# Allegro board LinkingInterfaceV2_13.brd
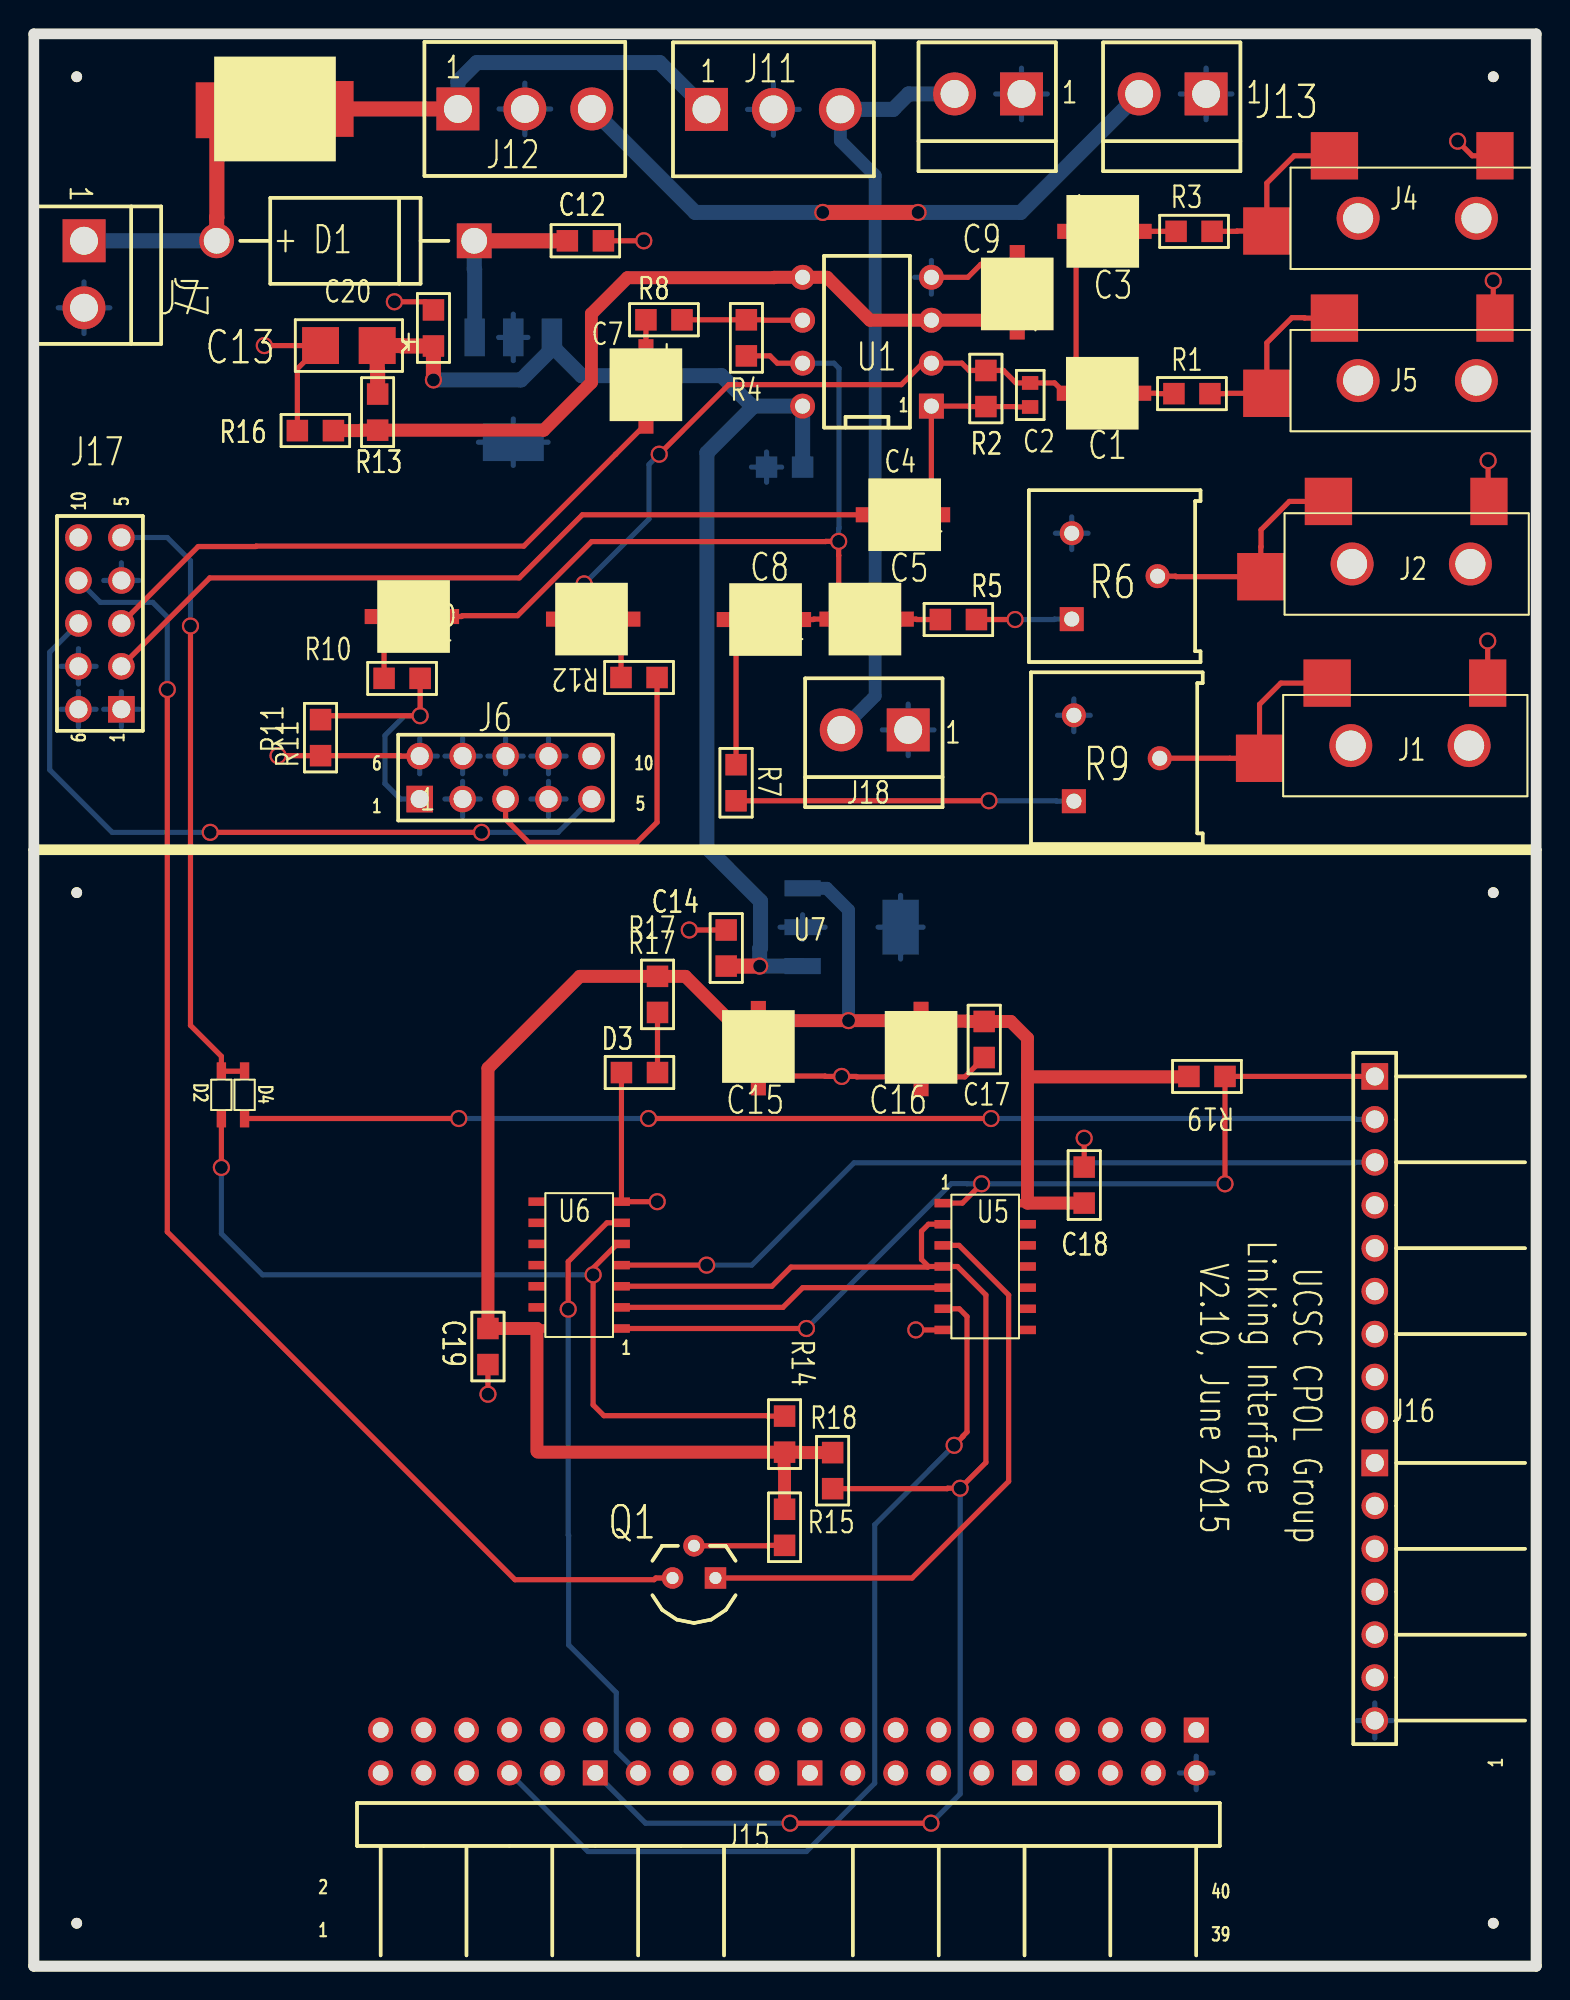
[diagram p0: board, top side]
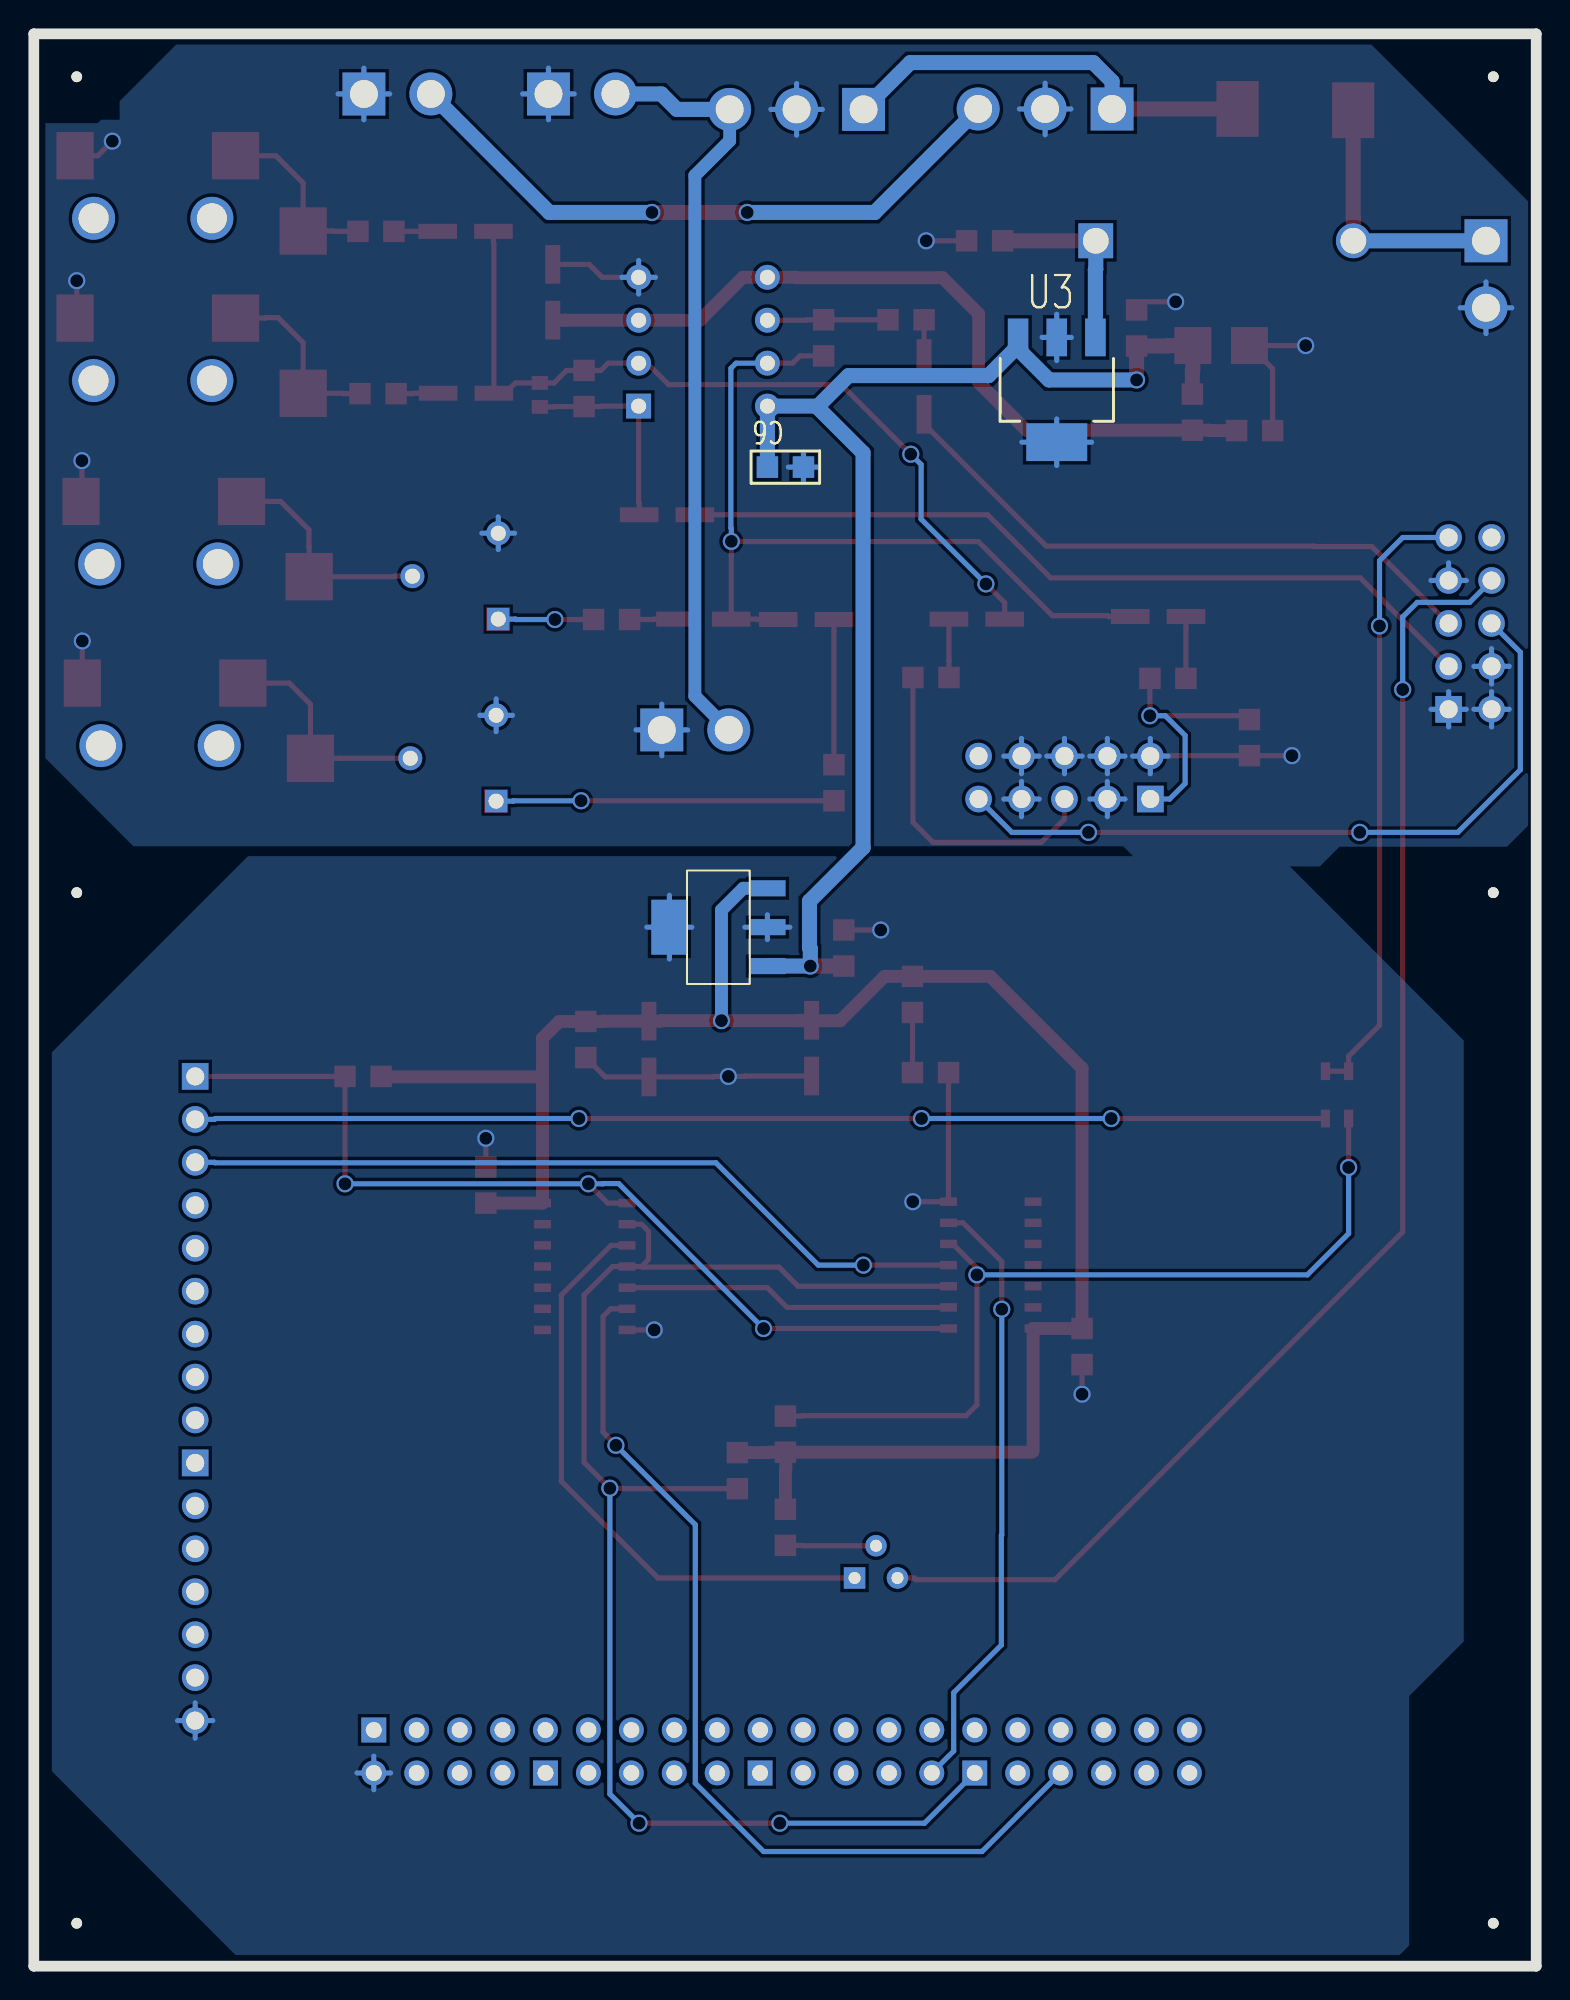
[diagram p1: board, bottom side, seen from below]

Outline 88.9 x 114.3 mm; copper layers: TOP, BOTTOM. Coordinates in mm from the lower left corner of the outline.
Outline path: rectangle 0,0 88.9,114.3 ; 0,114.3 0,0 88.9,0 88.9,114.3 0,114.3

## Placement (name value [footprint] x y rotation side)
C1  10uF  [1_UF_CAP]  61.98 93.04 270 top
C2  100pF  [SMC0603]  58.95 92.23 90 top
C3  10uF  [1_UF_CAP]  62 102.62 270 top
C4  10uF  [1_UF_CAP]  52.78 85.85 90 top
C5  10uF  [1_UF_CAP]  47.93 79.68 270 top
C6  100nF  [SMC0805]  43.36 88.67 0 bottom
C7  1uF  [1_UF_CAP]  36.22 94.79 180 top
C8  10uF  [1_UF_CAP]  44.55 79.65 90 top
C9  4.7uF  [1_UF_CAP]  58.19 97.66 0 top
C10  10uF  [1_UF_CAP]  23.72 79.83 90 top
C11  10uF  [1_UF_CAP]  31.75 79.68 270 top
C12  470nF  [SMC0805]  31.57 102.06 0 top
C13  22uF/Tant  [EIAB_SMCT3528_12]  20.32 95.86 180 top
C14  100nF  [SMC0805]  40.97 61.29 270 top
C15  10uF  [1_UF_CAP]  42.88 55.65 180 top
C16  10uF  [1_UF_CAP]  52.5 55.6 180 top
C17  100nF  [SMC0805]  56.24 53.75 90 top
C18  100nF  [SMC0805]  62.15 47.27 270 top
C19  100nF  [SMC0805]  26.87 37.72 270 top
C20  100nF  [SMC0805]  23.65 97.97 270 top
D1  SB1245  [DAX600_60D]  10.82 102.06 0 top
D2  1N4148  [1N4148_SOD523]  11.1 50.14 0 top
D3  RED  [SMR0805]  36.91 52.86 180 top
D4  1N4148  [1N4148_SOD523]  12.47 50.14 0 top
D5  -  [B320]  10.87 109.86 0 top
J1  TX_Echo  [35MMJACK]  86.51 97.54 0 top
J2  TX_Allstar  [35MMJACK]  86.51 107.14 0 top
J4  RX_Echo  [35MMJACK]  86.16 86.69 0 top
J5  Rx_Allstar  [35MMJACK]  86.08 75.95 0 top
J6  HEADER 9  [BCON2DB9_5X2V_100S_42D]  22.83 69.04 0 top
J7  0.156 VH  [BLKCON156_VHTM1SQ_SW156_2]  2.97 102.06 270 top
J11  HEADER 3  [BLKCON156VHTM1SQSW3123]  39.8 109.83 0 top
J12  HEADER 3  [BLKCON156VHTM1SQSW3123]  25.1 109.86 0 top
J13  0.156 VH  [BLKCON156_VHTM1SQ_SW156_2]  69.37 110.74 180 top
J14  0.156 VH  [BLKCON156_VHTM1SQ_SW156_2]  58.45 110.74 180 top
J15  HEADER 20X2  [BLKCON100RHTM2OEW52540]  68.78 13.97 180 top
J16  HEADER 16  [BLKCON100RHTM1SQSW35016]  79.35 52.63 270 top
J17  HEADER 9  [BCON2DB9_5X2V_100S_42D]  5.18 74.35 90 top
J18  0.156 VH  [BLKCON156_VHTM1SQ_SW156_2]  51.74 73.13 180 top
NOREF  -  [unnamed]  86.36 111.76 180 bottom
NOREF#2  -  [unnamed]  86.36 63.5 180 bottom
NOREF#3  -  [unnamed]  86.36 2.54 180 bottom
NOREF#4  -  [unnamed]  2.54 111.76 180 bottom
NOREF#5  -  [unnamed]  2.54 2.54 180 bottom
NOREF#6  -  [unnamed]  2.54 63.5 180 bottom
Q1  2N2222  [TO92R100]  39.07 22.96 180 top
R1  51k  [SMR0805]  67.46 93.01 0 top
R2  51k  [SMR0805]  56.34 92.25 90 top
R3  51k  [SMR0805]  67.59 102.62 0 top
R4  51k  [SMR0805]  42.16 97.38 270 top
R5  7.5k  [SMR0805]  53.64 79.65 0 top
R6  10k  [VRES18_35D]  63.96 82.22 90 top
R7  7.5k  [SMR0805]  41.55 71.07 270 top
R8  51k  [SMR0805]  36.22 97.38 0 top
R9  10k  [VRES18_35D]  64.08 71.45 90 top
R10  7.5k  [SMR0805]  20.73 76.17 0 top
R11  10k  [SMR0805]  16.97 71.6 90 top
R12  51k  [SMR0805]  34.75 76.23 0 top
R13  51k  [SMR0805]  20.35 90.86 90 top
R14  10k  [SMR0805]  44.42 32.54 270 top
R15  10k  [SMR0805]  44.42 27.03 270 top
R16  51k  [SMR0805]  15.6 90.83 0 top
R17  330  [SMR0805]  36.91 56.41 90 top
R18  10k  [SMR0805]  47.27 28.24 90 top
R19  10k  [SMR0805]  70.48 52.63 180 top
U1  TL072  [DIP100_8_W300_L400]  53.11 92.28 90 top
U3  LM2940 / SOT223  LDO  [SOT223_1234]  26.09 96.34 0 bottom
U5  74HC08  [74HC0]  53.8 45.14 270 top
U6  74HC04  [74HC0]  34.77 37.72 90 top
U7  LM2936/SO_5  [LM2936_SOT]  45.44 59.16 90 bottom

## Library data of the parts
C1 C3 C7 C11 = CAPACITOR POL
C2 C6 C12 C14 C17-C20 = C NP
C4 C5 C8-C10 C15 C16 = CAP POL
C13 = C POL
D1 D5 = DIODE SCHOTTKY_0
D2 D4 = 1N4148
D3 = LED
J1 J2 J4 J5 = PHONE JACK-3_2
J6 = HEADER 9_0
J7 J13 J14 J18 = HEADER 2_4
J11 J12 = HEADER 3
J15 = HEADER 20X2
J16 = HEADER 16
J17 = HEADER 9
Q1 = 2N2222
R1-R5 R7 R8 R10-R19 = RESISTOR
R6 R9 = POT
U1 = TL072_0
U3 = 78L05/TO92_0
U5 = 74HC08_4
U6 = 74HC04_5
U7 = LM2936/SO_13

## Footprints (pads in the part's own frame, mm; a bottom-side part is the same pattern mirrored in y, then rotated)
1_UF_CAP
  rect 0.889x2.286 smd: 1(0,-0.3) 2(0,3)
1N4148_SOD523
  rect 0.551x1.049 smd: 1(0,0) 2(0,2.799)
35MMJACK
  round 2.54 hole 1.778: (-8.151,-3.749) (-1.151,-3.749)
  rect 2.2x2.799 smd: 1(-0.051,-0.051)
  rect 2.799x2.799 smd: 2(-9.55,-0.051) 3(-13.551,-4.501)
74HC0
  rect 0.5x1.001 smd: 1(0,0) 2(1.25,0) 3(2.499,0) 4(3.749,0) 5(5.001,0) 6(6.251,0) 7(7.501,0) 8(7.501,5.001) 9(6.251,5.001) 10(5.001,5.001) 11(3.749,5.001) 12(2.499,5.001) 13(1.25,5.001) 14(0,5.001)
B320
  rect 2.499x3.299 smd: 1(-0.041,-0.079) 2(6.8,0)
BCON2DB9_5X2V_100S_42D
  round 1.575 hole 1.067: (10.16,2.54) 2(2.54,0) 3(5.08,0) 4(7.62,0) 5(10.16,0) 6(0,2.54) 7(2.54,2.54) 8(5.08,2.54) 9(7.62,2.54)
  rect 1.575x1.575 hole 1.067: 1(0,0)
BLKCON100RHTM1SQSW35016
  rect 1.575x1.575 hole 1.067: 1(0,0) 10(22.86,0)
  round 1.575 hole 1.067: 2(2.54,0) 3(5.08,0) 4(7.62,0) 5(10.16,0) 6(12.7,0) 7(15.24,0) 8(17.78,0) 9(20.32,0) 11(25.4,0) 12(27.94,0) 13(30.48,0) 14(33.02,0) 15(35.56,0) 16(38.1,0)
BLKCON100RHTM2OEW52540
  rect 1.473x1.473 hole 0.94: 1(0,0) 10(10.16,2.54) 20(22.86,2.54) 30(35.56,2.54)
  round 1.473 hole 0.94: 2(0,2.54) 3(2.54,0) 4(2.54,2.54) 5(5.08,0) 6(5.08,2.54) 7(7.62,0) 8(7.62,2.54) 9(10.16,0) 11(12.7,0) 12(12.7,2.54) 13(15.24,0) 14(15.24,2.54) 15(17.78,0) 16(17.78,2.54) 17(20.32,0) 18(20.32,2.54) 19(22.86,0) 21(25.4,0) 22(25.4,2.54) 23(27.94,0) 24(27.94,2.54) 25(30.48,0) 26(30.48,2.54) 27(33.02,0) 28(33.02,2.54) 29(35.56,0) 31(38.1,0) 32(38.1,2.54) 33(40.64,0) 34(40.64,2.54) 35(43.18,0) 36(43.18,2.54) 37(45.72,0) 38(45.72,2.54) 39(48.26,0) 40(48.26,2.54)
BLKCON156_VHTM1SQ_SW156_2
  rect 2.54x2.54 hole 1.651: 1(0,0)
  round 2.54 hole 1.651: 2(3.962,0)
BLKCON156VHTM1SQSW3123
  rect 2.54x2.54 hole 1.651: 1(0,0)
  round 2.54 hole 1.651: 2(3.962,0) 3(7.925,0)
DAX600_60D
  round 2.057 hole 1.524: 1(0,0)
  rect 2.057x2.057 hole 1.524: 2(15.24,0)
DIP100_8_W300_L400
  rect 1.473x1.473 hole 0.889: 1(0,0)
  round 1.473 hole 0.889: 2(2.54,0) 3(5.08,0) 4(7.62,0) 5(7.62,7.62) 6(5.08,7.62) 7(2.54,7.62) 8(0,7.62)
EIAB_SMCT3528_12
  rect 2.184x2.184 smd: 1(0,0) 2(3.353,0)
LM2936_SOT
  rect 0.95x2.149 smd: 1(0,0.051) 2(2.301,0.051) 3(4.6,0.051)
  rect 3.251x2.149 smd: 4(2.301,5.85)
SMC0603
  rect 0.813x0.965 smd: 1(0,0) 2(1.422,0)
SMC0805
  rect 1.27x1.27 smd: 1(0,0) 2(2.134,0)
SMR0805
  rect 1.27x1.27 smd: 1(0,0) 2(2.134,0)
SOT223_1234
  rect 1.219x2.235 smd: 1(0,0) 2(2.286,0) 3(4.572,0)
  rect 3.607x2.235 smd: 4(2.286,6.198)
TO92R100
  rect 1.27x1.27 hole 0.711: 1(-1.27,0)
  round 1.27 hole 0.711: 2(0,-1.905) 3(1.27,0)
unnamed
  round 0.635 hole 3.175 unplated: (0,0)
VRES18_35D
  rect 1.422x1.422 hole 0.889: 1(-2.54,2.54)
  round 1.422 hole 0.889: 2(0,-2.54) 3(2.54,2.54)

## Nets
+3.3V: C15.1 C16.1 C17.2(B) C18.2(B) C19.1(A) R14.2 R15.1 R17.2 R18.2 R19.2 U5.14(+3.3V) U6.14(+3.3V) U7.3(+3.3V)
+4.5V: C9.1 R13.1 R16.2 U1.3(+IN) U1.5(+IN)
+9V: C6.2(B) C13.1(P) C14.2(B) C20.2(B) R13.2 U1.8(+9V) U3.3(+9V) U7.1(+9V)
GND: C6.1(A) C9.2 C12.2(B) C13.2(N) C14.1(A) C15.2 C16.2 C17.1(A) C18.1(A) C19.2(B) C20.1(A) D3.2(CATHODE) J1.1 J2.1 J4.1 J5.1 J6.2 J6.4 J6.6 J6.7 J6.8 J6.9 J7.2 J11.2 J12.2 J13.1 J14.1 J15.2 J16.16 J17.1 J17.4 J17.6 J17.7 J18.1 R6.3(B) R9.3(B) R11.1 R16.1 U1.4(GND) U3.2(G1) U3.4(G2) U5.7(GND) U6.7(GND) U7.2(GND#2) U7.4(GND#4)
AUDIO_AUX: C7.2 J17.3
AUDIOOUT: C4.2 J17.2
COS: D2.2 D4.2 J17.5
COS_ALLSTAR: D4.1 J16.2
DTMF_AUDIO: J6.1 R10.2 R11.2
DTMF_TONE_CONFIRMATION: J6.3 R12.2
INHIBIT: J6.5 J17.8
PTT: J17.9 Q1.3(COLLECTOR)
PTT_E: J15.30 R18.1 U5.2(B) U5.4(A) U6.3(A)
RX_A: J5.2 J5.3 R9.2(WIPER)
RX_E: J4.2 J4.3 R6.2(WIPER)
TX_A: J2.2 J2.3 R3.2
N88559: C1.1 C2.2(B) C3.1 C11.1 R2.2 U1.2(-IN)
N88575: C2.1(A) C4.1 R2.1 U1.1(OUT)
N89923: C5.1 C8.1 C10.1 R4.2 U1.7(OUT)
N90145: C1.2 R1.1
N90149: C3.2 R3.1
N90849: R4.1 R8.2 U1.6(-IN)
N96497: J15.34 U5.6(Y)
N134507: C5.2 R5.1
N134567: C10.2 R10.1
N134575: C8.2 R7.1
N134810: R5.2 R6.1(A)
N196050: J1.2 J1.3 R1.2
N904010: R7.2 R9.1(A)
N908810: C7.1 R8.1
N14521945: C12.1(A) D1.2(CATHODE) U3.1(IN)
N14527017: J16.1 R19.1 U5.1(A) U6.1(A)
N14538770: D1.1(ANODE) D5.1(ANODE) J7.1
N14545130: J16.3 U6.4(Y)
N14551658: C11.2 R12.1
N14592870: J15.28 U6.6(Y)
N14597991: U5.5(B) U6.2(Y)
N14601768: D5.2(CATHODE) J11.1 J12.1
N14603309: J11.3 J14.2 J18.2
N14603313: J12.3 J13.2
N14619662: D2.1 R14.1 U6.5(A)
N14629991: Q1.1(EMITTER) U5.3(Y)
N145714160: D3.1(ANODE) R17.1
N146226602: Q1.2(BASE) R15.2

Pads without a net: J15 1 3 4 5 6 7 8 9 10 11 12 13 14 15 16 17 18 19 20 21 22 23 24 25 26 27 29 31 32 33 35 36 37 38 39 40; J16 4 5 6 7 8 9 10 11 12 13 14 15; U5 8 9 10 11 12 13; U6 8 9 10 11 12 13

## Via types
v1: diameter 1.016, hole 0.762, TOP to BOTTOM, 43 vias

## Routing (per net, layer and track width the routed paths; a pad name or vN(x,y) marks a point on that pad's centre or on a via; arc(x,y) is an arc through that point)
+3.3V: length 115.4
  TOP w0.305: 29.82,30.4 29.77,30.45
  TOP w0.762: 44.4,30.4 29.82,30.4 ; 44.4,30.4 44.4,29.41 44.42,29.39 R15.1 ; 44.4,30.4 R14.2 45.39,30.4 45.42,30.38 R18.2 ; 43.6,55.93 v1(48.21,55.93) 51.77,55.93 51.8,55.9 C16.1 55.22,55.9 55.24,55.88 C17.2 57.81,55.88 58.8,54.89 58.8,52.65 ; 43.6,55.93 43.58,55.95 C15.1 ; 43.6,55.93 43.6,55.93 41.18,55.93 38.56,58.55 R17.2 32.31,58.55 26.87,53.11 C19.1 U6.14 29.77,30.45 ; 58.8,52.65 58.85,52.6 68.12,52.6 68.15,52.63 R19.2 ; 58.8,52.65 U5.14 C18.2
  BOTTOM w0.762: U7.3 46.92,63.76 48.21,62.47 v1(48.21,55.93)
+4.5V: length 47.7
  TOP w0.762: R16.2 19.33,90.83 19.35,90.86 R13.1 30.18,90.86 32.99,93.68 32.99,97.74 35.13,99.87 43.79,99.87 43.81,99.9 U1.5 46.94,99.9 49.48,97.36 U1.3 57.48,97.36 57.49,97.36 C9.1
+9V: length 76.7
  TOP w0.889: R13.2 20.35,94.39 20.32,94.41 C13.1 21.77,95.86 21.79,95.83 C20.2 v1(23.65,93.83) ; C14.2 v1(42.95,59.16)
  BOTTOM w0.305: 42.6,92.28 42.55,92.23 ; 30.66,95.83 U3.3
  BOTTOM w0.889: U7.1 v1(42.95,59.16) 42.95,60.19 43,60.24 43,62.99 39.83,66.16 39.83,89.51 42.55,92.23 40.69,94.08 32.41,94.08 30.66,95.83 30.66,95.66 28.83,93.83 v1(23.65,93.83) ; 42.6,92.28 U1.8 C6.2
GND: length 190.9
  TOP w0.305: J6.6 21.69,71.58 21.67,71.6 R11.1 v1(14.45,71.6) ; R16.1 15.6,94.49 C13.2 v1(13.64,95.86) ; C19.2 v1(26.87,33.83) ; v1(21.34,98.45) 23.16,98.45 C20.1 ; C9.2 56.03,100.66 55.27,99.9 U1.4 ; D3.2 U6.7 v1(36.89,45.22) ; C18.1 v1(62.15,48.97) ; v1(86.36,99.69) 86.36,97.59 J1.1 ; v1(86.06,89.05) 86.06,86.69 J4.1 ; C12.2 v1(36.09,102.06) ; C17.1 55.09,52.6 C16.2 48.69,52.6 48.67,52.63 v1(47.8,52.63) 46.84,52.63 46.81,52.65 C15.2 ; U5.7 v1(52.19,37.64) ; J2.1 85.12,107.09 v1(84.25,107.95) ; C14.1 v1(38.79,61.29) ; J5.1 v1(86.03,78.38)
  BOTTOM w0.305: 52.12,99.9 U1.4 ; U1.4 53.11,100.89 ; U1.4 53.11,98.91 ; U1.4 54.1,99.9 ; J17.7 2.64,77.93 ; J17.7 2.64,75.84 ; J17.7 3.69,76.89 ; J17.7 1.6,76.89 ; 25.37,70.53 J6.7 ; J6.7 25.37,72.62 ; J6.7 24.33,71.58 ; J6.7 26.42,71.58 ; 51.29,59.58 U7.4 ; U7.4 52.62,61.46 ; U7.4 49.96,61.46 ; U7.4 51.29,63.34 ; J6.2 26.42,69.04 ; J6.2 25.37,67.99 ; J6.2 24.33,69.04 ; J6.2 25.37,70.08 ; 28.37,88.77 U3.4 ; U3.4 26.31,90.14 ; U3.4 30.43,90.14 ; U3.4 28.37,91.52 ; 2.64,73.3 J17.6 ; J17.6 2.64,75.39 ; J17.6 1.6,74.35 ; J17.6 3.69,74.35 ; J15.2 69.78,11.43 ; J15.2 67.79,11.43 ; J15.2 68.78,10.44 ; J15.2 68.78,12.42 ; 79.35,13.48 J16.16 ; J16.16 79.35,15.57 ; J16.16 80.39,14.53 ; J16.16 78.31,14.53 ; 4.14,74.35 J17.1 ; J17.1 6.23,74.35 ; J17.1 5.18,75.39 ; J17.1 5.18,73.3 ; C6.1 44.25,88.67 ; C6.1 42.47,88.67 ; C6.1 43.36,89.56 ; C6.1 43.36,87.78 ; 22.83,70.53 J6.6 ; J6.6 23.88,71.58 ; J6.6 22.83,72.62 ; J6.6 21.79,71.58 ; J11.2 43.76,111.36 ; J11.2 45.29,109.83 ; J11.2 42.24,109.83 ; J11.2 43.76,108.3 ; J14.1 58.45,112.27 ; J14.1 58.45,109.22 ; J14.1 56.92,110.74 ; J14.1 59.97,110.74 ; J6.8 27.91,72.62 ; J6.8 27.91,70.53 ; J6.8 26.87,71.58 ; J6.8 28.96,71.58 ; 29.06,108.33 J12.2 ; J12.2 29.06,111.38 ; J12.2 30.58,109.86 ; J12.2 27.53,109.86 ; 1.45,98.09 J7.2 ; J7.2 4.5,98.09 ; J7.2 2.97,96.57 ; J7.2 2.97,99.62 ; 30.45,67.99 J6.4 ; J6.4 31.5,69.04 ; J6.4 30.45,70.08 ; J6.4 29.41,69.04 ; 69.37,109.22 J13.1 ; J13.1 67.84,110.74 ; J13.1 69.37,112.27 ; J13.1 70.89,110.74 ; J6.9 31.5,71.58 ; J6.9 30.45,72.62 ; J6.9 29.41,71.58 ; J6.9 30.45,70.53 ; J17.4 6.23,81.97 ; J17.4 4.14,81.97 ; J17.4 5.18,83.01 ; U7.2 45.49,62.19 ; U7.2 46.82,61.46 ; U7.2 44.16,61.46 ; U7.2 45.49,60.73 ; R6.3 62.38,84.76 ; R6.3 60.45,84.76 ; R6.3 61.42,85.73 ; R6.3 61.42,83.79 ; 27.51,96.34 U3.2 ; U3.2 28.37,94.97 ; U3.2 29.24,96.34 ; U3.2 28.37,97.72 ; 60.58,73.99 R9.3 ; R9.3 61.54,73.02 ; R9.3 61.54,74.96 ; R9.3 62.51,73.99 ; 50.21,73.13 J18.1 ; J18.1 53.27,73.13 ; J18.1 51.74,71.6 ; J18.1 51.74,74.65
AUDIO_AUX: length 36.5
  TOP w0.305: C7.2 36.22,91.22 34.43,89.43 34.43,89.43 29,84 13.16,84 13.13,83.97 9.73,83.97 J17.3
AUDIOOUT: length 48.3
  TOP w0.305: C4.2 32.46,85.85 28.73,82.12 10.41,82.12 J17.2
COS: length 37
  TOP w0.305: D4.2 D2.2 11.1,53.82 9.27,55.65 v1(9.27,79.27)
  BOTTOM w0.305: J17.5 7.9,84.51 9.27,83.13 v1(9.27,79.27)
COS_ALLSTAR: length 66.9
  TOP w0.305: D4.1 v1(25.15,50.14) ; v1(36.37,50.14) v1(56.64,50.14)
  BOTTOM w0.305: v1(25.15,50.14) v1(36.37,50.14) ; v1(56.64,50.14) 78.16,50.14 78.21,50.09 J16.2
DTMF_AUDIO: length 16
  TOP w0.305: R10.2 v1(22.86,73.96) 17.2,73.96 R11.2
  BOTTOM w0.305: J6.1 21.69,69.04 20.78,69.95 20.78,72.8 21.95,73.96 v1(22.86,73.96)
DTMF_TONE_CONFIRMATION: length 19.8
  TOP w0.305: J6.3 27.91,67.84 29.29,66.47 35.69,66.47 36.88,67.67 R12.2
INHIBIT: length 43.8
  TOP w0.305: v1(10.44,67.07) v1(26.49,67.07)
  BOTTOM w0.305: J6.5 31.02,67.07 v1(26.49,67.07) ; J17.8 0.94,77.72 0.94,70.76 4.64,67.07 v1(10.44,67.07)
PTT: length 81
  TOP w0.305: v1(7.9,75.51) 7.9,43.43 28.47,22.86 36.7,22.86 36.8,22.96 Q1.3
  BOTTOM w0.305: J17.9 3.94,80.67 7.04,80.67 7.9,79.81 v1(7.9,75.51)
PTT_E: length 87.7
  TOP w0.305: 52.94,41.39 52.53,41.8 52.53,43.47 52.94,43.89 U5.2 ; 52.94,41.39 U5.4 54.65,41.39 56.34,39.7 56.34,29.79 v1(54.81,28.27) 54.08,28.27 54.05,28.24 R18.1 ; 52.94,41.39 52.91,41.35 44.81,41.35 43.67,40.22 U6.3 ; v1(53.09,8.46) v1(44.75,8.46)
  BOTTOM w0.305: v1(54.81,28.27) 54.81,10.19 v1(53.09,8.46) ; J15.30 36.2,8.46 v1(44.75,8.46)
RX_A: length 13.6
  TOP w0.305: J5.2 73.79,75.9 72.53,74.64 J5.3 70.77,71.45 70.77,71.45 R9.2
RX_E: length 13.6
  TOP w0.305: J4.2 74.3,86.64 72.62,84.96 72.62,83.96 72.61,83.94 J4.3 67.59,82.19 67.56,82.22 R6.2
TX_A: length 10.8
  TOP w0.305: R3.2 71.19,102.62 71.21,102.64 J2.3 72.96,105.47 74.57,107.09 J2.2
N88559: length 49.3
  TOP w0.305: C3.1 61.7,101.91 61.68,101.88 C1.1 61.01,93.04 60.4,93.65 C2.2 58.12,93.65 57.38,94.39 R2.2 55.35,94.39 54.91,94.82 U1.2 52.6,94.82 51.33,93.55 41.12,93.55 v1(37.01,89.43) ; C11.1 31.45,80.65 v1(32.56,81.76)
  BOTTOM w0.305: v1(32.56,81.76) 36.4,85.6 36.4,88.82 v1(37.01,89.43)
N88575: length 12.3
  TOP w0.305: C2.1 58.12,92.23 58.09,92.25 R2.1 55.35,92.25 55.32,92.28 U1.1 53.11,86.59 53.08,86.56 C4.1
N89923: length 48.9
  TOP w0.305: R4.2 43.56,95.25 43.99,94.82 U1.7 ; C10.1 25.3,79.83 25.35,79.88 28.63,79.88 33.01,84.27 46.85,84.27 46.86,84.28 v1(47.62,84.28) 47.62,83.45 47.63,83.44 C5.1 46.16,79.68 46.13,79.65 C8.1
  BOTTOM w0.305: U1.7 47.35,94.82 47.65,94.51 47.65,85.06 47.62,85.04 v1(47.62,84.28)
N90145: length 2.5
  TOP w0.305: C1.2 66.45,93.04 66.47,93.01 R1.1
N90149: length 2.6
  TOP w0.305: R3.1 C3.2
N90849: length 7.1
  TOP w0.305: U1.6 43.18,97.36 43.15,97.38 R4.1 R8.2
N96497: length 56.7
  TOP w0.305: v1(54.46,30.81) 54.98,31.33 54.98,31.36 55.22,31.6 55.22,38.43 54.76,38.88 U5.6
  BOTTOM w0.305: v1(54.46,30.81) 49.76,26.11 49.76,10.82 45.72,6.78 32.79,6.78 J15.34
N134507: length 2.7
  TOP w0.305: C5.2 52.21,79.68 52.24,79.65 R5.1
N134567: length 3.7
  TOP w0.305: R10.1 20.73,79.12 20.72,79.13 C10.2
N134575: length 8.6
  TOP w0.305: R7.1 41.55,78.95 41.55,78.95 C8.2
N134810: length 5.6
  TOP w0.305: R5.2 v1(58.06,79.65)
  BOTTOM w0.305: v1(58.06,79.65) 60.38,79.65 60.4,79.68 R6.1
N196050: length 11
  TOP w0.305: J1.2 75.21,97.49 75.18,97.51 74.45,97.51 72.96,96.02 J1.3 70.61,93.04 70.59,93.01 R1.2
N904010: length 20
  TOP w0.305: R7.2 v1(56.52,68.94)
  BOTTOM w0.305: v1(56.52,68.94) 60.5,68.94 60.53,68.91 R9.1
N908810: length 2.3
  TOP w0.305: R8.1 C7.1
N14521945: length 11.2
  TOP w0.889: D1.2 C12.1
  BOTTOM w0.889: D1.2 26.06,100.38 26.09,100.35 U3.1
N14527017: length 57.2
  TOP w0.305: U5.1 54.94,45.14 v1(56.08,46.28) ; J16.1 R19.1 v1(70.48,46.28) ; U6.1 v1(45.72,37.72)
  BOTTOM w0.305: v1(45.72,37.72) 54.29,46.29 55.21,46.29 55.22,46.28 v1(56.08,46.28) v1(70.48,46.28)
N14538770: length 15.6
  TOP w0.889: D1.1 10.82,103.44 10.83,103.45 D5.1
  BOTTOM w0.889: D1.1 J7.1
N14545130: length 47.1
  TOP w0.305: U6.4 v1(39.81,41.47)
  BOTTOM w0.305: v1(39.81,41.47) 42.48,41.47 48.54,47.52 78.18,47.52 78.21,47.55 J16.3
N14551658: length 3.5
  TOP w0.305: R12.1 34.75,77.22 34.75,77.22 C11.2
N14592870: length 36.1
  TOP w0.305: v1(31.62,38.86) 31.62,41.68 33.92,43.97 U6.6
  BOTTOM w0.305: v1(31.62,38.86) 31.62,25.5 31.65,25.48 31.65,19 34.47,16.18 34.47,12.73 J15.28
N14597991: length 19.5
  TOP w0.305: U5.5 45.49,40.13 44.33,38.97 U6.2
N14601768: length 25.4
  TOP w0.889: D5.2 J12.1
  BOTTOM w0.889: J12.1 25.1,111.48 26.21,112.6 37.03,112.6 J11.1
N14603309: length 45.5
  BOTTOM w0.762: J11.3 47.73,107.98 49.78,105.92 49.78,75.13 J18.2
  BOTTOM w0.889: J14.2 51.77,110.74 50.85,109.83 J11.3
N14603313: length 37.8
  TOP w0.889: v1(46.69,103.73) v1(52.32,103.73)
  BOTTOM w0.889: J13.2 58.39,103.73 v1(52.32,103.73) ; v1(46.69,103.73) 39.14,103.73 J12.3
N14619662: length 51.8
  TOP w0.305: U6.5 34.52,42.72 33.1,41.29 v1(33.1,40.89) 33.1,33.2 33.73,32.56 43.41,32.56 43.43,32.54 R14.1 ; D2.1 v1(11.1,47.24)
  BOTTOM w0.305: v1(11.1,47.24) 11.1,43.33 13.54,40.89 v1(33.1,40.89)
N14629991: length 35.8
  TOP w0.305: Q1.1 51.97,22.96 57.68,28.68 57.68,39.7 54.75,42.64 U5.3
N145714160: length 3.6
  TOP w0.305: D3.1 R17.1
N146226602: length 5.4
  TOP w0.305: R15.2 43.43,24.89 43.41,24.87 Q1.2

## Copper pours and planes (outline as drawn; the poured copper is in the pictures)
GND on BOTTOM: 0.48,67.46 0.48,104.39 9.75,113.67 80.47,113.67 85.12,109.02 88.21,109.02 88.21,71.45 83.01,66.24 24.43,66.24 23.24,65.05 12.8,65.05 11.63,66.22 1.73,66.22
GND on BOTTOM: 7.52,1.22 7.52,15.98 4.29,19.2 4.29,54.76 15.19,65.66 76.23,65.66 87.83,54.05 87.83,11.53 76.96,0.66 8.08,0.66

## Text on the board
Board Geometry/Soldermask Bottom: SMB
Ref Des/Silkscreen Bottom: SSB
TOP: TOP
Board Geometry/Soldermask Top: SMT
Ref Des/Silkscreen Top: 2 | 1 | 40 | 39 | D2 | D4 | C10 | U6 | C7 | J15 | U7 | J18 | C4 | U5 | C2 | J4 | J5 | J16 | J1 | J2 | J17 | D5 | + | D1 | J6 | J12 | C15 | J11 | C8 | U1 | C16 | C5 | C9 | C1 | C3 | V2.10, June 2015 | Linking Interface | UCSC CPOL Group | SST
COMPVAL_TYPE_TOP: FIGURE | SIZE | 70.0 | 65.0 | 60.0 | 42.0 | 37.0 | 35.0 | 30.0 | 28.0 | 125.0 | DRILL CHART: TOP to BOTTOM | ALL UNITS ARE IN MILS | PLATED | NON-PLATED | QTY | 8 | 14 | 1 | 18 | 40 | 43 | 3 | 6
User.5: BOTTOM
User.6: MECH
